# Allegro board AWheel.brd
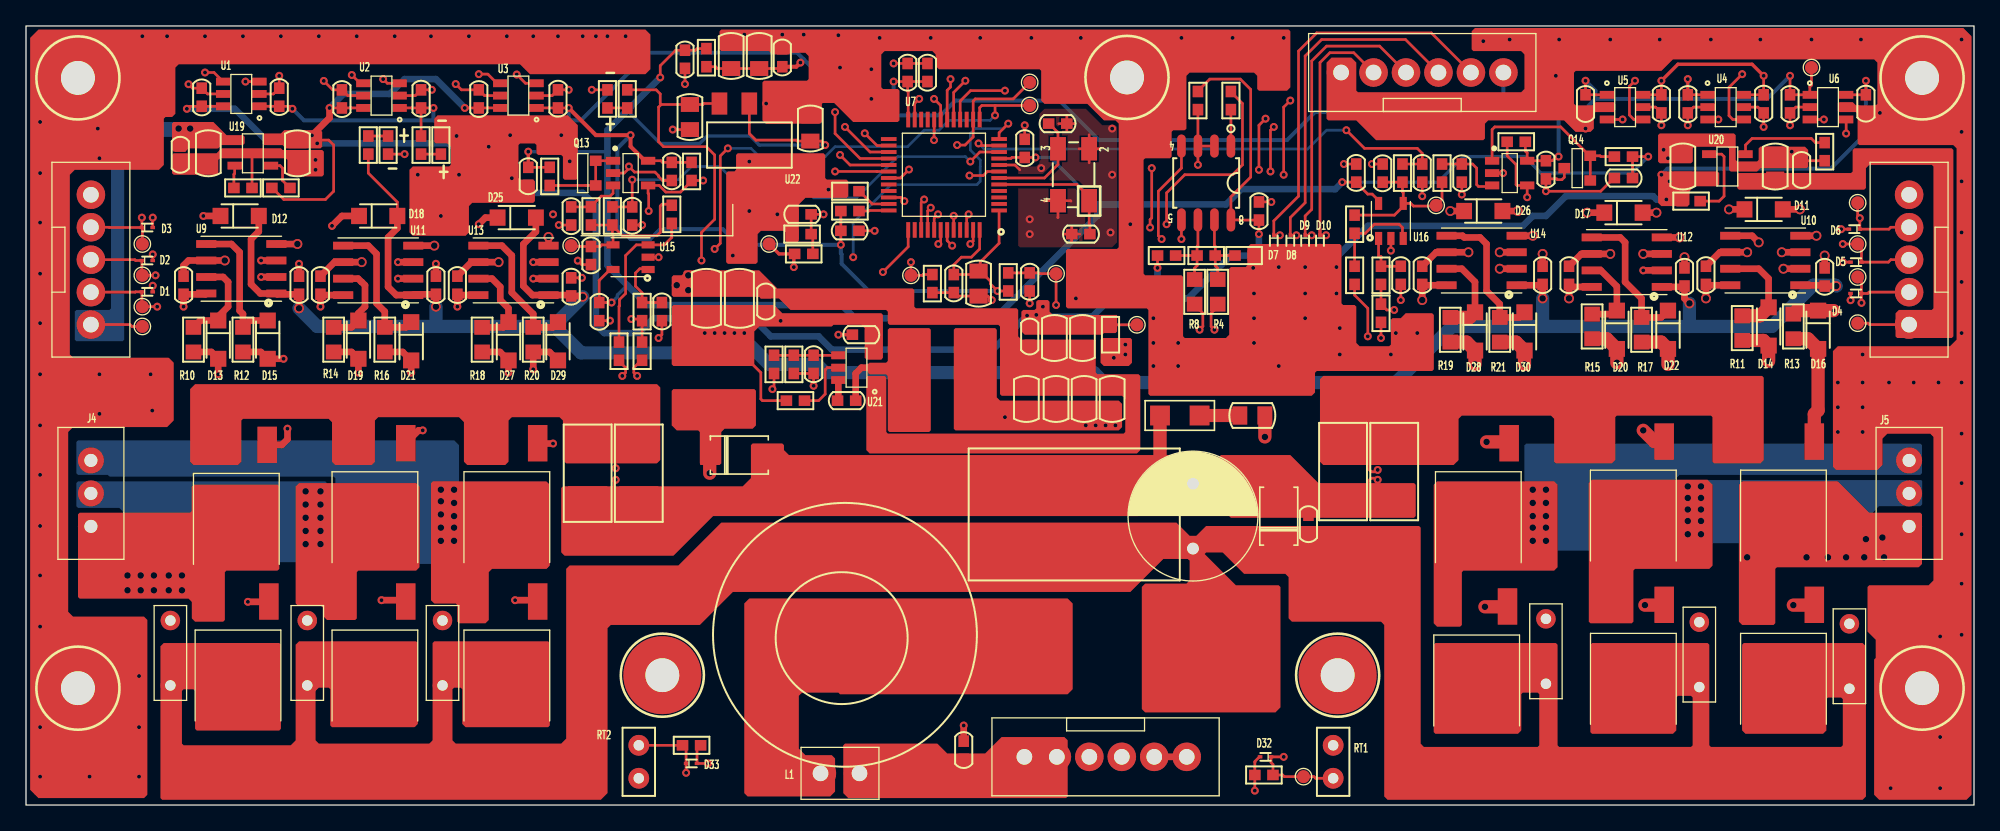
[diagram p0: board, top side]
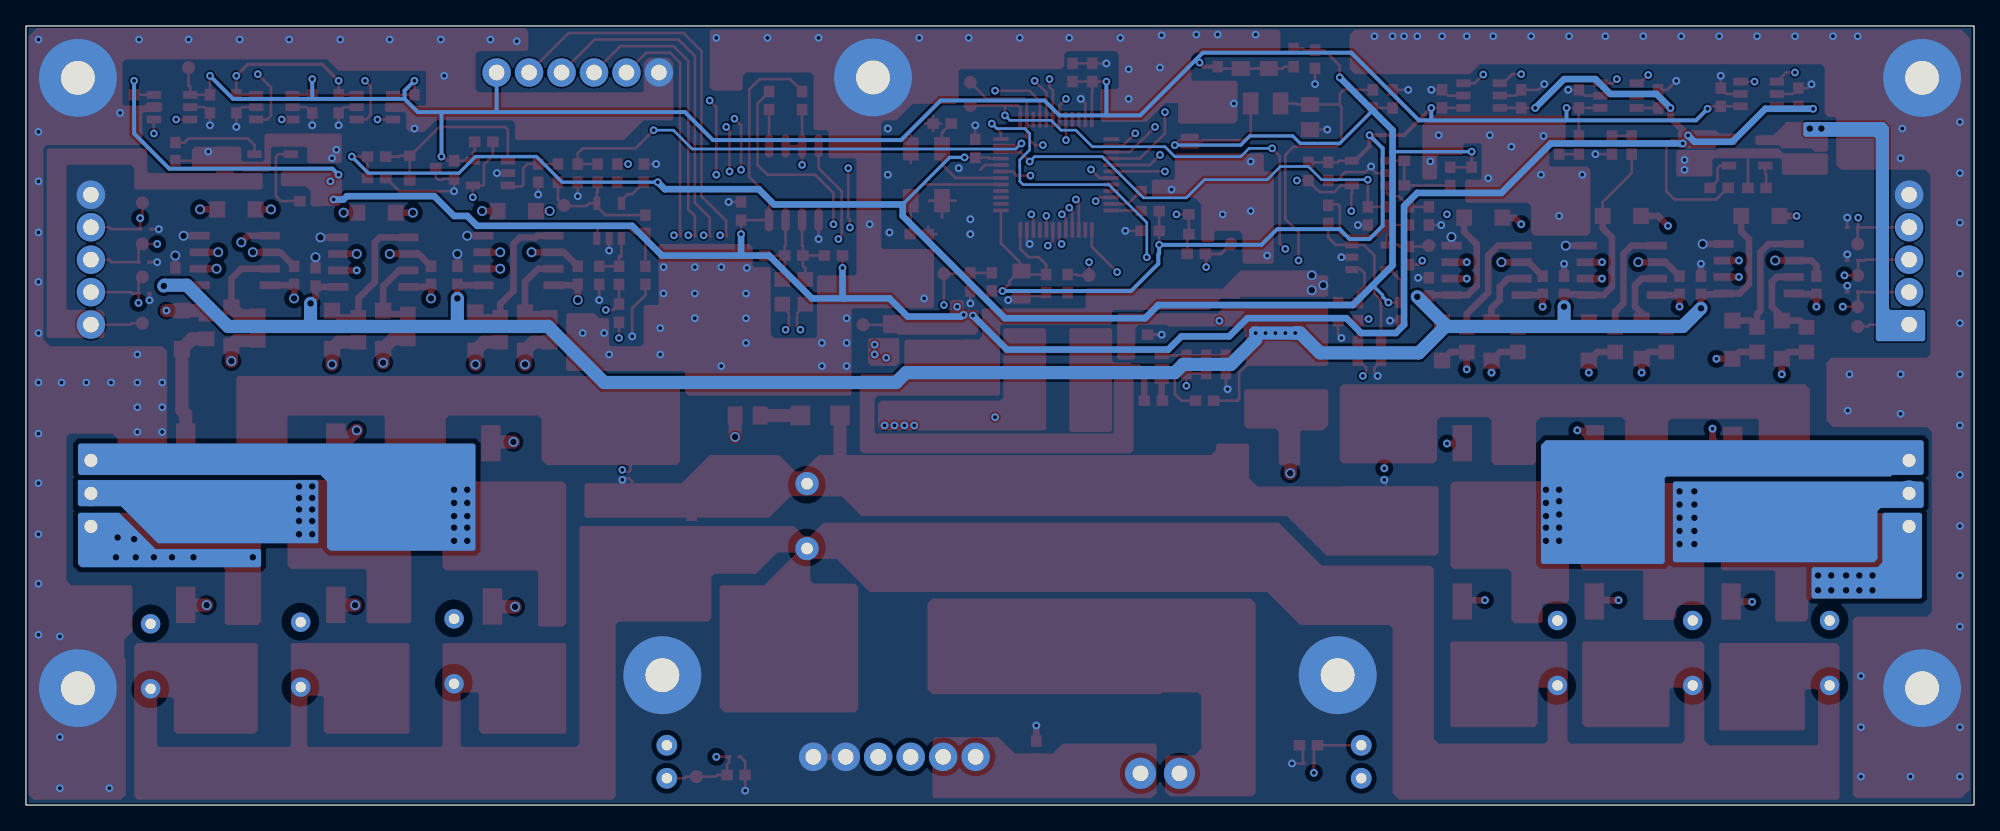
[diagram p1: board, bottom side, seen from below]

Outline 150 x 60 mm; copper layers: TOP, IN1, IN2, BOTTOM. Coordinates in mm from the lower left corner of the outline.
Outline path: rectangle 0,0 150,60

## Placement (name value [footprint] x y rotation side)
C1  0.1uF  [C0603]  19.5 54.51 90 top
C2  0.1uF  [C0603]  13.53 54.51 270 top
C3  0.1uF  [C0603]  24.33 54.38 270 top
C4  0.1uF  [C0603]  30.42 54.38 90 top
C5  0.1uF  [C0603]  40.96 54.38 90 top
C6  0.1uF  [C0603]  34.87 54.38 270 top
C7  0.1uF  [C0603]  120.09 54 270 top
C8  0.1uF  [C0603]  125.93 54 90 top
C9  0.1uF  [C0603]  133.8 54 90 top
C10  0.1uF  [C0603]  127.96 54 270 top
C11  0.1uF  [C0603]  141.68 54 90 top
C12  0.1uF  [C0603]  135.83 54 270 top
C13  12pF  [C0603]  81.22 43.97 0 top
C14  12pF  [C0603]  79.45 52.48 180 top
C15  0.1uF  [C0603]  77.29 40.29 90 top
C16  10uF  [C0805]  73.35 40.16 270 top
C17  0.1uF  [C0603]  63.44 44.22 180 top
C18  0.1uF  [C0603]  71.44 40.16 90 top
C19  0.1uF  [C0603]  69.41 56.42 270 top
C20  0.1uF  [C0603]  67.89 56.42 270 top
C21  0.1uF  [C0603]  94.94 45.75 270 top
C22  1nF  [B32529]  11.12 11.71 90 top
C23  1nF  [B32529]  140.41 11.46 90 top
C24  1uF  [C0603]  12.14 40.03 90 top
C25  1uF  [C0603]  129.36 40.79 90 top
C26  0.1uF  [C0603]  21.03 40.03 90 top
C27  0.1uF  [C0603]  138.5 40.67 90 top
C28  1nF  [B32529]  21.66 11.71 90 top
C29  1nF  [B32529]  128.85 11.58 90 top
C30  1uF  [C0603]  22.68 40.03 90 top
C31  1uF  [C0603]  118.82 40.79 90 top
C32  0.1uF  [C0603]  31.57 40.03 90 top
C33  0.1uF  [C0603]  127.71 40.67 90 top
C34  0.1uF  [C0603]  72.21 4.22 90 top
C35  470uF  [C10X16]  89.86 22.25 90 top
C36  0.1uF  [C0603]  98.75 21.62 90 top
C37  1nF  [B32529]  32.07 11.71 90 top
C38  1nF  [B32529]  117.04 11.84 90 top
C39  1uF  [C0603]  33.22 40.03 90 top
C40  1uF  [C0603]  107.51 40.79 90 top
C41  0.1uF  [C0603]  41.98 39.91 90 top
C42  0.1uF  [C0603]  116.78 40.79 90 top
C43  470pF  [C0805]  94.43 30 180 top
C44  1nF  [C0603]  43.5 42.32 90 top
C45  1nF  [C0603]  104.46 48.67 270 top
C46  0.1uF  [C0603]  44.14 38 270 top
C47  1nF  [C0603]  48.97 38 90 top
C48  0.1uF  [C0603]  102.43 48.67 90 top
C49  1nF  [C0603]  105.86 40.79 90 top
C50  0.1uF  [C0603]  49.73 48.8 90 top
C51  0.1uF  [C0603]  117.04 48.92 90 top
C52  0.1uF  [C0603]  41.98 45.37 270 top
C53  0.1uF  [C0603]  110.56 48.67 270 top
C54  1nF  [C0603]  46.68 45.37 90 top
C55  1nF  [C0603]  107.51 48.67 90 top
C56  0.1uF  [C0603]  38.68 48.41 90 top
C57  0.1uF  [C0603]  123.01 48.29 0 top
C58  10uF  [C0805]  20.9 50.19 270 top
C59  10uF  [C0805]  127.58 49.18 90 top
C60  10uF  [C1206]  54.93 39.02 90 top
C61  10uF  [C1206]  52.39 39.02 90 top
C62  0.1uF  [C0603]  56.97 38.76 90 top
C63  10uF  [C0805]  14.04 50.19 90 top
C64  0.1uF  [C0603]  11.88 50.07 90 top
C65  10uF  [C0805]  134.69 49.18 270 top
C66  0.1uF  [C0603]  136.72 48.92 270 top
C67  1uF  [C0603]  63.19 31.14 0 top
C68  0.1uF  [C0603]  64.33 36.22 180 top
C69  22pF  [C0603]  60.65 33.94 90 top
C70  10uF  [C0805]  83.64 31.27 90 top
C71  10uF  [C0805]  81.48 31.27 90 top
C72  10uF  [C0805]  77.03 31.27 90 top
C73  10uF  [C0805]  79.32 31.27 90 top
C74  10uF  [C0805]  81.35 35.97 270 top
C75  10uF  [C0805]  79.19 35.97 270 top
C76  0.1uF  [C0603]  77.29 36.1 270 top
C77  10uF  [C0805]  51.12 52.99 270 top
C78  10uF  [C0805]  60.4 52.1 90 top
C79  0.1uF  [C0603]  50.74 57.43 270 top
C80  10uF  [C0805]  54.3 57.69 90 top
C81  10uF  [C0805]  56.46 57.69 90 top
C82  0.1uF  [C0603]  58.24 57.56 90 top
C83  1nF  [C0603]  59.76 45.49 0 top
C84  0.1uF  [C0603]  76.91 50.57 90 top
D1  LESD9D5.0CT5G  [SOD-923]  9.34 39.52 180 top
D2  LESD9D5.0CT5G  [SOD-923]  9.34 41.94 180 top
D3  LESD9D5.0CT5G  [SOD-923]  9.34 44.48 180 top
D4  LESD9D5.0CT5G  [SOD-923]  140.91 39.4 0 top
D5  LESD9D5.0CT5G  [SOD-923]  140.91 41.81 0 top
D6  LESD9D5.0CT5G  [SOD-923]  140.79 44.35 0 top
D7  LESD9D3.3CT5G  [SOD-923]  96.08 43.46 90 top
D8  LESD9D3.3CT5G  [SOD-923]  97.35 43.46 90 top
D9  LESD9D3.3CT5G  [SOD-923]  98.5 43.46 90 top
D10  LESD9D3.3CT5G  [SOD-923]  99.64 43.46 90 top
D11  FR102W  [SOD-123FL]  133.8 45.87 180 top
D12  FR102W  [SOD-123FL]  16.45 45.37 180 top
D13  1N4148WL  [SOD-123FL]  14.8 35.84 90 top
D14  1N4148WL  [SOD-123FL]  134.18 36.86 90 top
D15  1N4148WL  [SOD-123FL]  18.61 35.84 90 top
D16  1N4148WL  [SOD-123FL]  137.99 36.6 90 top
D17  FR102W  [SOD-123FL]  123.01 45.62 180 top
D18  FR102W  [SOD-123FL]  27.12 45.37 180 top
D19  1N4148WL  [SOD-123FL]  25.6 35.84 90 top
D20  1N4148WL  [SOD-123FL]  122.5 36.6 90 top
D21  1N4148WL  [SOD-123FL]  29.66 35.71 90 top
D22  1N4148WL  [SOD-123FL]  126.44 36.6 90 top
D23  2CZ20100A0  [TO-263]  79.19 12.09 270 top
D24  SMAJ18A  [SMA]  96.46 24.54 0 top
D25  FR102W  [SOD-123FL]  37.79 45.24 180 top
D26  FR102W  [SOD-123FL]  112.21 45.75 180 top
D27  1N4148WL  [SOD-123FL]  37.15 35.71 90 top
D28  1N4148WL  [SOD-123FL]  111.58 36.48 90 top
D29  1N4148WL  [SOD-123FL]  40.96 35.71 90 top
D30  1N4148WL  [SOD-123FL]  115.39 36.48 90 top
D31  SMAJ18A  [SMA]  57.22 26.95 270 top
D32  LESD9D3.3CT5G  [SOD-923]  95.45 3.71 0 top
D33  LESD9D3.3CT5G  [SOD-923]  51.25 3.2 180 top
D35  LED  [R0603]  27.88 50.83 270 top
D36  LED  [R0603]  31.95 50.83 90 top
D37  LED  [R0603]  44.77 54.38 90 top
H1  Mechanical Hole  [H_M2_6]  146 56 0 top
H2  Mechanical Hole  [H_M2_6]  146 9 0 top
H3  Mechanical Hole  [H_M2_6]  101 10 0 top
H4  Mechanical Hole  [H_M2_6]  49 10 0 top
H5  Mechanical Hole  [H_M2_6]  4 9 0 top
H6  Mechanical Hole  [H_M2_6]  4 56 0 top
H7  Mechanical Hole  [H_M2_6]  84.78 56.03 0 top
J1  ENCA  [B5B-XH-A]  5 42 90 top
J2  CON6  [B6B-XH-A]  83.13 3.71 0 top
J3  ENCB  [B5B-XH-A]  145 42 270 top
J4  MOTORA  [CON3_254]  5 24 90 top
J5  MOTORB  [CON3_254]  145 24 270 top
J6  CON6  [B6B-XH-A]  107.51 56.42 180 top
L1  4mH  [CON2_300]  62.68 2.44 180 top
L2  60uH  [SRN6045]  52.9 32.67 90 top
L3  10uH  [SM7850]  70.56 32.67 0 top
L4  120R  [R0603]  83.51 36.22 90 top
L5  120R  [R0603]  52.39 57.56 270 top
NOREF  -  []  150 0 90 top
NOREF#2  -  []  13.95 15.67 0 top
NOREF#3  -  []  135.33 21.59 90 top
NOREF#4  -  []  123.77 9.02 90 top
NOREF#5  -  []  34.65 15.67 0 top
NOREF#6  -  []  24.49 27.87 0 top
NOREF#7  -  []  24.49 15.67 0 top
NOREF#8  -  []  132.95 15.42 0 top
NOREF#9  -  []  16.33 9.27 90 top
NOREF#10  -  []  86.88 3.71 0 top
NOREF#11  -  []  112.89 48.67 90 top
NOREF#12  -  []  55.7 47.63 90 top
NOREF#13  -  []  52.9 30.52 90 top
NOREF#14  -  []  37.03 9.27 90 top
NOREF#15  -  []  13.82 27.74 0 top
NOREF#16  -  []  0 0 0 top
NOREF#17  -  []  37.03 21.47 90 top
NOREF#18  -  []  34.65 27.87 0 top
NOREF#19  -  []  121.39 27.99 0 top
NOREF#20  -  []  45.2 48.67 90 top
NOREF#21  -  []  111.83 21.47 90 top
NOREF#22  -  []  109.33 15.29 0 top
NOREF#23  -  []  121.39 15.42 0 top
NOREF#24  -  []  43.87 47.72 90 top
NOREF#25  -  []  111.7 8.89 90 top
NOREF#26  -  []  16.2 21.34 90 top
NOREF#27  -  []  135.33 9.02 90 top
NOREF#28  -  []  26.87 9.27 90 top
NOREF#29  -  []  43.87 47.72 90 top
NOREF#30  -  []  120.45 48.1 90 top
NOREF#31  -  []  109.45 27.87 0 top
NOREF#32  -  []  53.4 54.03 0 top
NOREF#33  -  []  112.89 47.72 0 top
NOREF#34  -  []  26.87 21.47 90 top
NOREF#35  -  []  101.26 56.42 0 top
NOREF#36  -  []  45.2 47.72 0 top
NOREF#37  -  []  120.45 48.1 90 top
NOREF#38  -  []  123.77 21.59 90 top
NOREF#39  -  []  132.95 27.99 0 top
Q1  NCE6020AK  [TO252]  16.33 12.47 180 top
Q2  NCE6020AK  [TO252]  135.33 12.22 180 top
Q3  NCE6020AK  [TO252]  16.2 24.54 180 top
Q4  NCE6020AK  [TO252]  135.33 24.79 180 top
Q5  NCE6020AK  [TO252]  123.77 12.22 180 top
Q6  NCE6020AK  [TO252]  26.87 12.47 180 top
Q7  NCE6020AK  [TO252]  26.87 24.67 180 top
Q8  NCE6020AK  [TO252]  123.77 24.79 180 top
Q9  NCE6020AK  [TO252]  37.03 12.47 180 top
Q10  NCE6020AK  [TO252]  111.7 12.09 180 top
Q11  NCE6020AK  [TO252]  37.03 24.67 180 top
Q12  NCE6020AK  [TO252]  111.83 24.67 180 top
Q13  ME431AXG  [SOT-23-3]  42.87 48.67 90 top
Q14  ME431AXG  [SOT-23-3]  119.45 49.05 90 top
R1  4.7K  [R0603]  75.64 40.29 270 top
R2  4.7K  [R0603]  69.79 40.16 90 top
R3  2.2K  [R0603]  93.8 42.32 180 top
R4  22R  [R0805]  91.76 39.52 270 top
R5  100R  [R0603]  92.78 54.26 270 top
R6  120R  [R0603]  90.88 42.32 0 top
R7  4.7K  [R0603]  90.24 54.26 270 top
R8  22R  [R0805]  89.99 39.52 270 top
R9  2.2K  [R0603]  87.83 42.32 180 top
R10  10R  [R0805]  12.9 35.84 270 top
R11  10R  [R0805]  132.15 36.73 270 top
R12  10R  [R0805]  16.71 35.84 270 top
R13  10R  [R0805]  136.09 36.86 270 top
R14  10R  [R0805]  23.69 35.84 270 top
R15  10R  [R0805]  120.59 36.86 270 top
R16  10R  [R0805]  27.63 35.84 270 top
R17  10R  [R0805]  124.4 36.6 270 top
R18  10R  [R0805]  35.12 35.84 270 top
R19  10R  [R0805]  109.67 36.6 270 top
R20  10R  [R0805]  39.06 35.84 270 top
R21  10R  [R0805]  113.48 36.6 270 top
R22  4.7R  [R1206]  88.84 30 180 top
R23  4.99K  [R0603]  47.44 38 270 top
R24  100K  [R0603]  47.44 34.95 270 top
R25  4.99K  [R0603]  104.34 40.79 270 top
R26  100K  [R0603]  104.34 37.87 270 top
R27  33mR  [R2512]  47.19 25.55 90 top
R28  33mR  [R2512]  43.25 25.55 90 top
R29  33mR  [R2512]  105.35 25.68 90 top
R30  33mR  [R2512]  101.42 25.68 90 top
R31  2.49K  [R0603]  45.66 34.95 270 top
R32  2.49K  [R0603]  102.31 40.79 270 top
R33  2K  [R0603]  45.16 45.37 90 top
R34  2K  [R0603]  43.5 45.37 90 top
R35  34.8K  [R0603]  49.73 45.49 270 top
R36  2K  [R0603]  105.99 48.67 90 top
R37  2K  [R0603]  109.04 48.67 90 top
R38  34.8K  [R0603]  102.31 44.73 270 top
R39  4.7K  [R0603]  51.25 48.8 90 top
R40  4.7K  [R0603]  114.75 51.08 0 top
R41  2K  [R0603]  40.33 48.41 90 top
R42  2K  [R0603]  123.01 49.94 0 top
R43  4.7K  [R0603]  19.63 47.53 0 top
R44  4.7K  [R0603]  128.21 46.51 0 top
R45  16.9K  [R0603]  16.71 47.53 0 top
R46  16.9K  [R0603]  138.5 50.32 270 top
R47  200K  [R0603]  59.25 31.14 180 top
R48  100K  [R0603]  59.13 33.94 270 top
R49  18.7K  [R0603]  57.6 33.94 90 top
R50  100K  [R0603]  59.89 42.45 180 top
R51  16.9K  [R0603]  95.32 2.31 180 top
R52  16.9K  [R0603]  51.25 4.6 0 top
R53  18.7K  [R0603]  59.76 43.97 0 top
R54  4.7K  [R0603]  63.44 45.75 180 top
R55  4.7K  [R0603]  63.44 47.27 180 top
R56  16.9K  [R0603]  26.36 50.83 90 top
R57  2.2K  [R0603]  30.42 50.83 270 top
R58  4.7K  [R0603]  46.3 54.38 270 top
RT1  MF52A1103F3435  [CON2_254]  100.65 3.33 270 top
RT2  MF52A1103F3435  [CON2_254]  47.19 3.33 90 top
TP1  TP  [TP100]  8.96 38.38 0 top
TP2  TP  [TP100]  8.96 40.79 0 top
TP3  TP  [TP100]  8.96 43.21 0 top
TP4  TP  [TP100]  141.04 40.67 0 top
TP5  TP  [TP100]  141.04 43.21 0 top
TP6  TP  [TP100]  141.04 46.38 0 top
TP7  TP  [TP100]  68.14 40.79 180 top
TP8  TP  [TP100]  79.32 40.92 180 top
TP9  TP  [TP100]  41.98 43.08 0 top
TP10  TP  [TP100]  108.58 46.18 0 top
TP11  TP  [TP100]  57.22 43.21 180 top
TP12  TP  [TP100]  8.96 36.86 0 top
TP13  TP  [TP100]  141.04 37.11 0 top
TP14  TP  [TP100]  85.54 36.98 0 top
TP15  TP  [TP100]  137.48 56.8 0 top
TP16  TP  [TP100]  77.29 55.65 180 top
TP17  TP  [TP100]  98.37 2.19 0 top
TP18  TP  [TP100]  77.29 53.88 180 top
U1  74LVC1T45W6-7  [SOT-23-6]  16.58 54.76 90 top
U2  74LVC1T45W6-7  [SOT-23-6]  27.38 54.64 90 top
U3  74LVC1T45W6-7  [SOT-23-6]  37.92 54.64 90 top
U4  74LVC1T45W6-7  [SOT-23-6]  130.88 53.75 270 top
U5  74LVC1T45W6-7  [SOT-23-6]  123.13 53.75 270 top
U6  74LVC1T45W6-7  [SOT-23-6]  138.75 53.75 270 top
U7  STM32F030C8T6  [LQFP48]  70.68 48.54 90 top
U8  BL1585B  [SOP-8]  90.88 47.91 180 top
U9  EG2104  [SOIC-8]  16.58 41.3 90 top
U10  EG2104  [SOIC-8]  133.93 41.94 90 top
U11  EG2104  [SOIC-8]  27.12 41.18 90 top
U12  EG2104  [SOIC-8]  123.26 41.81 90 top
U13  EG2104  [SOIC-8]  37.54 41.18 90 top
U14  EG2104  [SOIC-8]  112.08 41.94 90 top
U15  LMV321TP-TR  [SOT23-5]  46.55 42.19 90 top
U16  LMV321TP-TR  [SOT23-5]  105.1 44.99 0 top
U17  TS391AG-AF5-R  [SOT25]  46.55 48.67 270 top
U18  TS391AG-AF5-R  [SOT25]  114.24 48.67 270 top
U19  MT9700  [SOT-23]  17.47 50.19 270 top
U20  MT9700  [SOT-23]  131.01 49.18 90 top
U21  MT1470  [SOT-23-6]  63.95 33.68 90 top
U22  SC1117-3.3  [SOT223]  55.7 50.83 180 top
X1  8MHz  [SY-AGX-5032]  80.72 48.54 90 top

## Library data of the parts
C1-C34 C36-C57 C60-C62 C67-C84 = CAP NP
C35 = CAP_0
C58 C59 C63-C66 = C
D1-D10 D24 D31-D33 = DIODE  TRIG
D11 D12 D17 D18 D25 D26 = DIODE_1
D13-D16 D19-D22 D27-D30 = DIODE_2
D23 = DIODE_DUAL_0
D35-D37 = LED_0
H1-H7 = MH8_0
J1 J3 = CON5
J2 J6 = CON6
J4 J5 = CON3
L1 = INDUCTOR IRON/SM
L2 L3 = INDUCTOR
L4 L5 = FERRITE_BEAD
Q1-Q12 = MOSFET-N
Q13 Q14 = TLV431
R1-R9 R33 R34 R36 R37 R39-R46 R51 R52 R54-R58 = R
R10-R32 R35 R38 R47-R50 R53 = RESISTOR
RT1 RT2 = NTC
TP1-TP18 = TP
U1-U6 = 74LVC1T45W6-7
U7 = STM32F030C8T6
U8 = BL1585B
U9-U14 = EG2104
U15 U16 = LMV321TP-TR
U17 U18 = TS391AG-AF5-R_1
U19 U20 = MT9700
U21 = MT1470
U22 = AP1117E33G-13
X1 = XTAL4P_13

## Footprints (pads in the part's own frame, mm; a bottom-side part is the same pattern mirrored in y, then rotated)
B5B-XH-A
  round 2.2 hole 1.2: 1(-5,0) 2(-2.5,0) 3(0,0) 4(2.5,0) 5(5,0)
B6B-XH-A
  round 2.2 hole 1.2: 1(-6.25,0) 2(-3.75,0) 3(-1.25,0) 4(1.25,0) 5(3.75,0) 6(6.25,0)
B32529
  round 1.5 hole 0.8: 1(-2.5,0) 2(2.5,0)
C10X16
  round 1.8 hole 0.9: 1(-2.5,0) 2(2.5,0)
C0603
  rect 0.889x0.813 smd: 1(-0.699,0) 2(0.699,0)
C0805
  rect 1.143x1.397 smd: 1(-0.965,0) 2(0.965,0)
C1206
  rect 1.27x1.575 smd: 1(-1.397,0) 2(1.397,0)
CON2_254
  round 1.6 hole 0.8: 1(-1.27,0) 2(1.27,0)
CON2_300
  round 2.4 hole 1.2: 1(-1.5,0) 2(1.5,0)
CON3_254
  round 2 hole 1: 1(-2.54,0) 2(0,0) 3(2.54,0)
H_M2_6
  round 6 hole 2.6: 1(0,0)
LQFP48
  rect 0.3x1.2 smd: 1(-2.75,-4.25) 2(-2.25,-4.25) 3(-1.75,-4.25) 4(-1.25,-4.25) 5(-0.75,-4.25) 6(-0.25,-4.25) 7(0.25,-4.25) 8(0.75,-4.25) 9(1.25,-4.25) 10(1.75,-4.25) 11(2.25,-4.25) 12(2.75,-4.25) 25(2.75,4.25) 26(2.25,4.25) 27(1.75,4.25) 28(1.25,4.25) 29(0.75,4.25) 30(0.25,4.25) 31(-0.25,4.25) 32(-0.75,4.25) 33(-1.25,4.25) 34(-1.75,4.25) 35(-2.25,4.25) 36(-2.75,4.25)
  rect 1.2x0.3 smd: 13(4.25,-2.75) 14(4.25,-2.25) 15(4.25,-1.75) 16(4.25,-1.25) 17(4.25,-0.75) 18(4.25,-0.25) 19(4.25,0.25) 20(4.25,0.75) 21(4.25,1.25) 22(4.25,1.75) 23(4.25,2.25) 24(4.25,2.75) 37(-4.25,2.75) 38(-4.25,2.25) 39(-4.25,1.75) 40(-4.25,1.25) 41(-4.25,0.75) 42(-4.25,0.25) 43(-4.25,-0.25) 44(-4.25,-0.75) 45(-4.25,-1.25) 46(-4.25,-1.75) 47(-4.25,-2.25) 48(-4.25,-2.75)
R0603
  rect 0.889x0.813 smd: 1(-0.699,0) 2(0.699,0)
R0805
  rect 1.14x1.2 smd: 1(-0.95,0) 2(0.95,0)
R1206
  rect 1.524x1.524 smd: 1(1.524,0) 2(-1.524,0)
R2512
  rect 2.515x3.023 smd: 1(-2.25,0) 2(2.25,0)
SM7850
  rect 3x7.5 smd: 1(-2.5,0) 2(2.5,0)
SMA
  rect 1.5x1.5 smd: 1(0,0) 2(0,-4.57)
SOD-123FL
  rect 1.22x1.25 smd: 1(-1.475,0) 2(1.475,0)
SOD-923
  rect 0.35x0.25 smd: 1(-0.42,0) 2(0.42,0)
SOIC-8
  rect 0.6x1.55 smd: 1(-1.905,-2.7) 2(-0.635,-2.7) 3(0.635,-2.7) 4(1.905,-2.7) 5(1.905,2.7) 6(0.635,2.7) 7(-0.635,2.7) 8(-1.905,2.7)
SOP-8
  oval 0.66x1.778 smd: 1(-1.905,-2.845) 2(-0.635,-2.845) 3(0.635,-2.845) 4(1.905,-2.845) 5(1.905,2.845) 6(0.635,2.845) 7(-0.635,2.845) 8(-1.905,2.845)
SOT23-5
  rect 0.55x1 smd: 1(-0.95,-1.35) 2(0,-1.35) 3(0.95,-1.35) 4(0.95,1.35) 5(-0.95,1.35)
SOT25
  rect 0.6x1.1 smd: 1(-0.95,-1.35) 2(0,-1.35) 3(0.95,-1.35) 4(0.95,1.35) 5(-0.95,1.35)
SOT223
  rect 1.2x1.7 smd: 1(-2.3,-3.2) 2(0,-3.2) 3(2.3,-3.2)
  rect 3.3x1.6 smd: 4(0,3.2)
SOT-23
  rect 0.6x1.1 smd: 1(-0.95,-1.4) 2(0,-1.4) 3(0.95,-1.4) 4(0.95,1.4) 5(-0.95,1.4)
SOT-23-3
  rect 0.8x0.9 smd: 1(-0.95,-1) 2(0.95,-1) 3(0,1)
SOT-23-6
  rect 0.6x1.1 smd: 1(-0.95,-1.4) 2(0,-1.4) 3(0.95,-1.4) 4(0.95,1.4) 5(0,1.4) 6(-0.95,1.4)
SRN6045
  rect 2x6 smd: 1(-2.15,0) 2(2.15,0)
SY-AGX-5032
  rect 1.803x1.219 smd: 1(-2,-1.15) 2(2,-1.15) 3(2,1.25) 4(-2,1.25)
TO252
  rect 1.5x2.8 smd: 1(-2.376,-3.2) 2(2.376,-3.2)
  rect 6.3x6.4 smd: 3(0,3.2)
TO-263
  rect 1.3x2 smd: 1(-2.54,0) 2(2.54,0)
  rect 9.2x10.2 smd: 3(0,12)
TP100
  round 1 smd: 1(0,0)

## Nets
3.3VCC: C46.1 C48.1 C56.2 C57.2 C78.1 C79.1 C84.1 L5.1 R41.2 R42.2 RT1.1 RT2.1 U7.9(VDDA) U15.5(VCC) U16.5(VCC) U22.2(VOUT)
3.3VDD: C1.1 C4.1 C5.1 C7.1 C10.1 C12.1 C16.1 C17.2 C18.2 C19.2 C20.2 C50.2 C51.2 C80.1 C81.1 C82.1 J6.1 L5.2 R1.2 R39.2 R40.2 R54.2 R57.1 TP15.1 U1.1(VCCA) U2.1(VCCA) U3.1(VCCA) U4.1(VCCA) U5.1(VCCA) U6.1(VCCA) U7.1(VDD1) U7.24(VDD2) U7.48(VDD3) U17.5(VCC) U18.5(VCC)
5VCC: C69.1 C70.1 C71.1 C72.1 C73.1 C77.1 L3.2 L4.1 R48.2 R58.1 U22.3(VIN)
5VDD: C2.2 C3.2 C6.2 C8.2 C9.2 C11.2 C21.2 C58.1 C59.1 C74.1 C75.1 C76.1 L4.2 R7.1 R9.2 R43.1 R44.1 TP14.1 U1.6(VCCB) U2.6(VCCB) U3.6(VCCB) U4.6(VCCB) U5.6(VCCB) U6.6(VCCB) U8.8(VCC) U19.5(VIN) U20.5(VIN)
GND: C1.2 C2.1 C3.1 C4.2 C5.2 C6.1 C7.2 C8.1 C9.1 C10.2 C11.1 C12.2 C13.1 C14.1 C15.1 C16.2 C17.1 C18.1 C19.1 C20.1 C21.1 C22.2 C23.2 C26.2 C27.2 C28.2 C29.2 C32.2 C33.2 C34.2 C35.2 C36.2 C37.2 C38.2 C41.2 C42.2 C46.2 C47.1 C48.2 C49.1 C50.1 C51.1 C52.2 C53.2 C54.1 C55.1 C56.1 C57.1 C58.2 C59.2 C60.2 C61.2 C62.2 C63.1 C64.1 C65.1 C66.1 C68.2 C70.2 C71.2 C72.2 C73.2 C74.2 C75.2 C76.2 C77.2 C78.2 C79.2 C80.2 C81.2 C82.2 C83.1 C84.2 D1.1 D2.1 D3.1 D4.1 D5.1 D6.1 D7.1 D8.1 D9.1 D10.1 D24.1 D31.1 D32.1 D33.1 D35.2(CATHODE) D36.2(CATHODE) D37.2(CATHODE) H1.1 H2.1 H3.1 H4.1 H5.1 H6.1 H7.1 J1.5 J2.5 J2.6 J3.1 J6.6 Q13.3(ANODE) Q14.3(ANODE) R2.1 R3.1 R22.1 R27.1 R28.1 R29.1 R30.1 R31.2 R32.2 R45.2 R46.2 R49.1 R51.2 R52.2 R53.1 R55.2 U1.2(GND) U1.5(DIR) U2.2(GND) U2.5(DIR) U3.2(GND) U3.5(DIR) U4.2(GND) U4.5(DIR) U5.2(GND) U5.5(DIR) U6.2(GND) U6.5(DIR) U7.8(VSSA) U7.23(VSS1) U7.47(VSS2) U8.5(GND) U9.4(GND) U10.4(GND) U11.4(GND) U12.4(GND) U13.4(GND) U14.4(GND) U15.2(GND) U16.2(GND) U17.2(GND) U18.2(GND) U19.2(GND) U20.2(GND) U21.1(GND) U22.1(GND) U22.4(TAB) X1.2 X1.4
VBUS: C34.1 D31.2 J2.1 J2.2 L1.1 L2.1
VCC: C26.1 C27.1 C32.1 C33.1 C41.1 C42.1 C60.1 C61.1 C62.1 C68.1 D11.1(A) D12.1(A) D17.1(A) D18.1(A) D25.1(A) D26.1(A) L2.2 R47.2 R50.2 R56.1 TP11.1 U9.1(VCC) U10.1(VCC) U11.1(VCC) U12.1(VCC) U13.1(VCC) U14.1(VCC) U21.3(VIN)
ADC_IN0: C54.2 R33.2 U7.10(PA0)
ADC_IN1: C55.2 R36.2 U7.11(PA1)
ADC_IN2: D32.2 R51.1 RT1.2 TP17.1 U7.12(PA2)
ADC_IN3: D33.2 R52.1 RT2.2 TP18.1 U7.13(PA3)
ADC_IN4: C83.2 R50.1 R53.2 TP16.1 U7.14(PA4)
BOOT0: R2.2 TP7.1 U7.44(BOOT0)
HALL1: U1.3(A) U7.28(PB15)
HALL2: U2.3(A) U7.27(PB14)
HALL3: U3.3(A) U7.26(PB13)
HALL4: U4.3(A) U7.39(PB3)
HALL5: U5.3(A) U7.40(PB4)
HALL6: U6.3(A) U7.41(PB5)
HALL_IN1: D1.2 J1.2 TP1.1 U1.4(B)
HALL_IN2: D2.2 J1.3 TP2.1 U2.4(B)
HALL_IN3: D3.2 J1.4 TP3.1 U3.4(B)
HALL_IN4: D4.2 J3.4 TP4.1 U4.4(B)
HALL_IN5: D5.2 J3.3 TP5.1 U5.4(B)
HALL_IN6: D6.2 J3.2 TP6.1 U6.4(B)
IN1: U7.29(PA8) U9.2(IN)
IN2: U7.30(PA9) U11.2(IN)
IN3: U7.31(PA10) U13.2(IN)
IN4: U7.16(PA6) U10.2(IN)
IN5: U7.17(PA7) U12.2(IN)
IN6: U7.18(PB0) U14.2(IN)
NRST: C15.2 R1.1 TP8.1 U7.7(NRST)
OSC_IN: C13.2 U7.5(PF0-OSC_IN) X1.1
OSC_OUT: C14.2 U7.6(PF1-OSC_OUT) X1.3
OUTUA: C24.2 J4.1 Q1.2(SOURCE) Q3.3(DRAIN) U9.6(VS)
OUTUB: C25.2 J5.3 Q2.2(SOURCE) Q4.3(DRAIN) U10.6(VS)
OUTVA: C30.2 J4.2 Q6.2(SOURCE) Q7.3(DRAIN) U11.6(VS)
OUTVB: C31.2 J5.2 Q5.2(SOURCE) Q8.3(DRAIN) U12.6(VS)
OUTWA: C39.2 J4.3 Q9.2(SOURCE) Q11.3(DRAIN) U13.6(VS)
OUTWB: C40.2 J5.1 Q10.2(SOURCE) Q12.3(DRAIN) U14.6(VS)
PA5: U7.15(PA5)
PA11: U7.32(PA11)
PA12: U7.33(PA12)
PA15: U7.38(PA15)
PB8: U7.45(PB8)
PB9: R7.2 U7.46(PB9) U8.2(R\E\) U8.3(DE)
PB10: U7.21(PB10)
PB11: U7.22(PB11)
PB12: U7.25(PB12)
PC13: U7.2(PC13)
PC14: U7.3(PC14-OSC32_IN)
PC15: U7.4(PC14-OSC32_OUT)
PF6: R55.1 U7.35(PF6)
PF7: R54.1 U7.36(PF7)
SWCLK: D10.2 J6.5 U7.37(PA14/SCK)
SWDIO: D9.2 J6.4 U7.34(PA13/SWDIO)
UART1_RX: D7.2 J6.2 R5.1 U7.43(PB7/USART1_RX)
UART1_TX: D8.2 J6.3 U7.42(PB6/USART1_TX) U8.4(DI)
VBLDC: C22.1 C23.1 C28.1 C29.1 C35.1 C36.1 C37.1 C38.1 C43.1 D23.3(K) D24.2 Q1.3(DRAIN) Q2.3(DRAIN) Q5.3(DRAIN) Q6.3(DRAIN) Q9.3(DRAIN) Q10.3(DRAIN)
VECDA: C63.2 C64.2 J1.1 TP12.1 U19.1(VOUT)
VECDB: C65.2 C66.2 J3.5 TP13.1 U20.1(VOUT)
N00514: D13.2(K) R10.1 U9.7(HO)
N00518: D15.2(K) R12.1 U9.5(LO)
N00591: C24.1 D12.2(K) U9.8(VB)
N00647: D13.1(A) Q1.1(GATE) R10.2
N00664: D15.1(A) Q3.1(GATE) R12.2
N00708: Q3.2(SOURCE) Q7.2(SOURCE) Q11.2(SOURCE) R24.2 R27.2 R28.2
N02294: D19.2(K) R14.1 U11.7(HO)
N02298: D21.2(K) R16.1 U11.5(LO)
N02334: C30.1 D18.2(K) U11.8(VB)
N02346: D19.1(A) Q6.1(GATE) R14.2
N02362: D21.1(A) Q7.1(GATE) R16.2
N02436: R39.1 U7.20(PB2) U9.3(S\D\) U11.3(S\D\) U13.3(S\D\) U17.4(OUT)
N02448: R40.1 U7.19(PB1) U10.3(S\D\) U12.3(S\D\) U14.3(S\D\) U18.4(OUT)
N03219: D27.2(K) R18.1 U13.7(HO)
N03223: D29.2(K) R20.1 U13.5(LO)
N03259: C39.1 D25.2(K) U13.8(VB)
N03271: D27.1(A) Q9.1(GATE) R18.2
N03287: D29.1(A) Q11.1(GATE) R20.2
N08581: D14.2(K) R11.1 U10.7(HO)
N08585: D16.2(K) R13.1 U10.5(LO)
N08621: C25.1 D11.2(K) U10.8(VB)
N08633: D14.1(A) Q2.1(GATE) R11.2
N08649: D16.1(A) Q4.1(GATE) R13.2
N08681: Q4.2(SOURCE) Q8.2(SOURCE) Q12.2(SOURCE) R26.2 R29.2 R30.2
N08995: D20.2(K) R15.1 U12.7(HO)
N08999: D22.2(K) R17.1 U12.5(LO)
N09035: C31.1 D17.2(K) U12.8(VB)
N09047: D20.1(A) Q5.1(GATE) R15.2
N09063: D22.1(A) Q8.1(GATE) R17.2
N09409: D28.2(K) R19.1 U14.7(HO)
N09413: D30.2(K) R21.1 U14.5(LO)
N09449: C40.1 D26.2(K) U14.8(VB)
N09461: D28.1(A) Q10.1(GATE) R19.2
N09477: D30.1(A) Q12.1(GATE) R21.2
N13042: C67.1 U21.6(BS)
N13046: C67.2 L3.1 U21.2(SW)
N13094: C69.2 R48.1 R49.2 U21.4(FB)
N13344: R47.1 U21.5(EN)
N62608: R43.2 U19.4(EN)
N62698: R45.1 U19.3(SET)
N63460: J2.3 R4.2
N63464: J2.4 R8.2
N63974: R44.2 U20.4(EN)
N64058: R46.1 U20.3(SET)
N64077: R5.2 U8.1(RO)
N64457: R3.2 R4.1 R6.2 U8.7(B)
N64480: R6.1 R8.1 R9.1 U8.6(A)
N70863: C43.2 R22.2
N74962: C44.1 R23.2 R24.1
N74968: C47.2 R23.1 U15.1(IN+)
N75708: C44.2 R33.1 R34.1 R35.1 TP9.1 U15.4(OUT)
N75929: R31.1 R35.2 U15.3(IN-)
N80070: Q13.1(REF) Q13.2(CATHODE) R41.1 U17.1(IN+)
N80316: C52.1 R34.2 U17.3(IN-)
N83162: Q14.1(REF) Q14.2(CATHODE) R42.1 U18.1(IN+)
N83212: C53.1 R37.2 U18.3(IN-)
N83236: C45.2 R36.1 R37.1 R38.1 TP10.1 U16.4(OUT)
N83438: C45.1 R25.2 R26.1
N83442: C49.2 R25.1 U16.1(IN+)
N83588: R32.1 R38.2 U16.3(IN-)
N88074: D23.1(A1) D23.2(A2) L1.2
N917231: D35.1(ANODE) R56.2
N923151: D36.1(ANODE) R57.2
N925221: D37.1(ANODE) R58.2

## Via types
v1: diameter 0.762, hole 0.508, TOP to BOTTOM, 111 vias
v2: diameter 0.61, hole 0.305, TOP to BOTTOM, 357 vias

## Routing (per net, layer and track width the routed paths; a pad name or vN(x,y) marks a point on that pad's centre or on a via; arc(x,y) is an arc through that point)
3.3VCC: length 260.5
  TOP w0.203: U16.5 104.15,46.56 103.66,47.05 103.31,47.05 102.43,47.93 C48.1 v2(101.35,47.97) ; v2(124.91,49.94) R42.2 C57.2 ; U7.9 75.84,49.79 75.92,49.88 C84.1 v2(77.73,49.88) ; U15.5 44.98,41.24 44.14,40.4 C46.1 v2(45.09,38.7) ; C56.2 R41.2 ; U22.2 55.7,51.72 56.2,51.21 59.32,51.21 59.39,51.13 C78.1 61.23,51.13 v2(61.54,50.83) ; v2(48.84,56.03) 48.84,56.94 50.03,58.13 C79.1 51.56,58.13 51.68,58.26 L5.1
  TOP w0.254: C56.2 v2(38.68,50.32)
  IN2 w0.203: v2(45.09,38.7) 43.38,36.98 43.38,18.06 45.16,16.28 52.14,16.28 53.03,15.39 53.03,6.63 48.46,2.06 RT2.1 ; RT1.1 97.35,7.9 97.35,13.49 100.02,16.16 100.02,42.32 101.35,43.65 v2(101.35,47.97)
  BOTTOM w0.254: 46.3,40.03 45.54,39.28 45.54,39.15 v2(45.09,38.7) ; v2(101.35,47.97) 108.72,47.97 110.69,49.94 115.39,49.94 116.66,48.67 123.64,48.67 v2(124.91,49.94) ; v2(77.73,49.88) 78.87,49.88 82.49,46.26 ; v2(38.68,50.32) 44.77,50.32 ; 46.3,53.49 48.84,50.95 51.89,50.95 52.46,51.53 55.75,51.53 56.46,50.83 v2(61.54,50.83)
  BOTTOM w0.508: v2(101.35,47.97) 100.81,47.43 93.57,47.43 92.4,46.26 82.49,46.26 82.49,45.37 74.62,37.49 63.82,37.49 62.81,38.51 47.82,38.51 44.77,41.56 44.77,51.97 v2(48.84,56.03)
3.3VDD: length 245.4
  TOP w0.203: U5.1 120.8,54.7 120.8,54.7 C7.1 v2(120.09,55.78) ; C4.1 v2(31.38,53.69) ; C4.1 R57.1 ; C4.1 29.71,53.69 29.71,53.69 U2.1 ; C82.1 58.1,56.72 C81.1 C80.1 53.24,56.72 53.11,56.86 L5.2 ; v2(41.79,53.69) C5.1 40.25,53.69 40.25,53.69 U3.1 ; v2(20.52,53.62) 20.33,53.81 C1.1 19.5,53.81 U1.1 ; v2(62.74,43.14) C17.2 R54.2 ; 73.48,41.13 73.48,41.81 74.93,43.27 U7.1 ; 73.48,41.13 74.26,40.34 74.26,40.13 v2(74.81,39.59) R1.2 ; 73.48,41.13 C16.1 73.08,40.86 C18.2 71.44,41.61 72.03,42.19 72.8,42.19 73.43,42.83 U7.48 ; v2(127.96,55.91) C10.1 127.96,54.7 U4.1 ; U7.24 67.93,54.92 67.89,54.97 C20.2 ; R39.2 C50.2 49.02,49.49 48.89,49.62 U17.5 ; TP15.1 137.48,55.43 137.35,55.3 U6.1 135.84,54.7 C12.1 v2(135.83,56.16) ; R40.2 115.45,50.37 115.59,50.23 U18.5 117.03,49.62 C51.2 117.52,49.62 117.84,49.94 v2(118.01,49.94) ; C20.2 C19.2 ; C20.2 v2(66.81,55.72)
  TOP w0.305: v2(59.63,57.18) 59.32,56.86 C82.1 ; v2(41.79,53.69) 43.89,51.59 v2(46.55,51.59) 46.55,50.72 47.65,49.62 U17.5
  BOTTOM w0.305: 41.85,52.73 31.44,52.73 ; 41.85,52.73 42.74,52.73 47.95,57.94 59.38,57.94 59.89,57.43 ; 41.85,52.73 41.79,52.8 v2(41.79,53.69) ; 31.44,52.73 21.41,52.73 v2(20.52,53.62) ; 31.44,52.73 31.38,52.8 v2(31.38,53.69) ; 127.96,54.38 134.06,54.38 v2(135.83,56.16) ; 127.96,54.38 120.85,54.38 ; 127.96,54.38 v2(127.96,55.91) ; 66.75,53.11 66.81,53.18 v2(66.81,55.72) ; 66.75,53.11 70.43,53.11 71.57,54.26 79.57,54.26 82.62,51.21 97.1,51.21 99.26,53.37 113.74,53.37 ; 66.75,53.11 64.21,53.11 59.89,57.43 ; 59.89,57.43 59.63,57.18 v2(59.63,57.18) ; v2(74.81,39.59) 64.9,39.59 62.81,41.68 62.81,42.42 62.74,42.48 v2(62.74,43.14) 54.87,43.14 53.66,44.35 48.84,44.35 48.08,43.59 46.55,43.59 45.54,44.6 45.54,50.57 v2(46.55,51.59) ; 120.85,54.38 119.83,53.37 118.05,53.37 ; 120.85,54.38 120.85,55.02 v2(120.09,55.78) ; 113.74,53.37 118.05,53.37 ; 113.74,53.37 113.76,53.39 J6.1 ; v2(118.01,49.94) 118.01,53.32 118.05,53.37
5VCC: length 55.7
  TOP w0.203: R58.1 48.52,55.08 48.84,54.76 48.84,54.03 48.91,53.95 ; v2(52.01,41.94) 52.01,44.1 53.03,45.11 53.03,50.07 52.39,50.7 49.09,50.7 48.71,51.08 48.71,53.75 48.91,53.95 ; 48.91,53.95 C77.1 52.13,53.95 52.2,54.03 U22.3 ; R48.2 C69.1 v2(60.65,32.29)
  IN2 w0.203: v2(52.01,41.94) 52.01,40.92 v2(60.65,32.29) 72.97,32.29 v2(75.38,29.87)
  vias: v2(81.6,29.24) v2(82.37,29.24) v2(83.13,29.24) v2(83.76,34.44) v2(83.89,29.24) v2(84.65,35.46) v2(84.65,34.7)
5VDD: length 239.8
  TOP w0.203: U3.6 35.58,53.69 35.58,53.69 C6.2 v2(33.79,53.69) ; v2(141.68,55.78) C11.2 141.67,54.7 U6.6 ; U1.6 14.25,53.81 14.24,53.81 C2.2 12.58,53.81 v2(12.39,53.62) ; v2(133.8,56.16) C9.2 133.8,54.7 U4.6 ; R44.1 127.51,47.27 127.58,47.34 C59.1 ; v2(125.93,55.78) C8.2 125.92,54.7 U5.6 ; R43.1 18.97,47.53 19.86,46.64 23.06,46.64 23.69,47.27 23.69,50.83 23.31,51.21 22.42,51.21 ; R7.1 90.24,54.99 91.15,55.91 93.5,55.91 94.3,55.11 94.3,48.36 92.78,46.84 U8.8 93.42,45.06 93.43,45.05 C21.2 v2(94.94,43.97) ; U2.6 25.04,53.69 25.04,53.69 C3.2 v2(23.37,53.69) ; R9.2 v2(87.13,41.37) ; L4.2 83.57,36.98 TP14.1
  TOP w0.254: v2(133.8,56.16) 132.91,57.05 127.2,57.05 v2(125.93,55.78)
  TOP w0.508: v2(22.02,51.57) 23.37,52.93 v2(23.37,53.69)
  IN2 w0.254: v2(133.8,56.16) 134.69,57.05 140.41,57.05 v2(141.68,55.78)
  BOTTOM w0.305: v2(125.93,48.54) 126.39,49.01 138.97,49.01 141.68,51.72 v2(141.68,55.78)
  BOTTOM w0.508: v2(12.39,53.62) 16.07,53.62 18.61,51.08 21.53,51.08 v2(22.02,51.57) ; v2(77.08,37.7) 74.47,35.08 62.05,35.08 61.03,36.1 57.35,36.1 55.95,37.49 48.33,37.49 47.19,36.35 44.52,36.35 43.89,36.98 43.89,46.13 42.87,47.14 36.39,47.14 32.58,50.95 v2(22.42,50.95) ; v2(33.79,53.69) 31.57,55.91 29.15,55.91 28.01,54.76 24.45,54.76 v2(23.37,53.69) ; v2(87.13,41.37) 87.13,39.08 87.07,39.02 ; v2(77.79,37.75) 77.86,37.75 77.99,37.62 82.11,37.62 83.51,39.02 87.07,39.02 ; 87.07,39.02 89.48,39.02 92.78,42.32 94.81,42.32 ; v2(126.31,46.64) 125.55,46.64 125.29,46.89 118.56,46.89 117.04,45.37 116.02,45.37 115.26,44.6 103.32,44.6 101.04,42.32 94.81,42.32 ; 94.81,42.32 94.94,42.45 v2(94.94,43.97)
  vias: v2(78.3,38.38) v2(126.56,48.03)
GND: length 235.1
  TOP w0.203: D36.2 v2(33.15,51.53) ; v2(72.71,43.21) 72.93,43.43 U7.47 ; R52.2 51.67,4.32 D33.1 v2(52.52,3.2) ; U16.2 v2(105.1,42.7) ; 118.4,49.05 Q14.3 118.45,48.35 118.27,48.16 117.93,48.16 117.86,48.22 C51.1 v2(117.04,47.27) 121.25,47.27 122.27,48.29 C57.1 ; U4.2 128.4,53.75 C10.2 v2(127.96,52.35) ; X1.4 79.47,45.26 79.45,45.24 ; X1.4 78.46,46.54 78.43,46.51 ; X1.4 80.43,46.54 80.46,46.51 ; v2(57.47,32.03) 57.6,32.16 R49.1 ; v2(103.32,36.1) 103.32,38.25 102.31,39.27 R32.2 ; v2(45.92,33.05) 46.17,33.3 46.17,33.68 45.66,34.19 R31.2 ; U6.5 141.23,53.75 C11.1 v2(142.75,53.3) ; v2(33.09,55.53) 33.53,55.08 C6.1 35.31,54.64 U3.5 ; R55.2 61.92,47.27 v2(61.79,47.4) ; U2.2 29.98,54.64 C4.2 v2(31.25,55.08) ; v2(48.71,35.97) 48.97,36.22 C47.1 ; C13.1 81.15,43.97 ; C13.1 80.52,43.39 ; C13.1 80.52,44.55 ; C13.1 79.9,43.97 ; D35.2 v2(29.15,50.13) ; D1.1 v2(9.76,39.99) ; v2(120.09,52.1) C7.2 120.53,53.75 U5.2 ; v2(74.37,38.89) 74.06,39.19 C16.2 71.71,39.19 C18.1 R2.1 ; C17.1 v2(65.35,44.22) ; C56.1 37.97,47.72 v2(37.41,48.28) ; U7.8 76.15,49.29 76.52,48.92 ; v2(94.62,1.11) R51.2 94.62,3.31 94.64,3.32 94.64,3.37 94.98,3.71 D32.1 ; C52.2 v2(41.03,44.67) ; U8.5 v2(88.97,43.59) ; C41.2 v2(42.81,40.6) ; D4.1 v2(140.49,38.88) ; 79.52,52.48 C14.1 ; C14.1 80.14,51.89 ; C14.1 80.14,53.06 ; C14.1 80.77,52.48 ; U2.5 24.77,54.64 C3.1 23.62,55.08 v2(22.93,55.77) ; v2(135.83,52.35) C12.2 136.28,53.75 U6.2 ; D5.1 v2(139.9,41.81) ; 81.08,50.54 X1.2 ; X1.2 81.87,51.62 ; X1.2 82.65,50.54 ; X1.2 81.87,49.46 ; C48.2 v2(101.48,49.37) ; U18.2 v2(113.74,48.67) ; C21.1 v2(95.89,46.45) ; C15.1 v2(77.29,38.64) ; v2(133.8,52.22) C9.1 133.36,53.75 U4.5 ; 103.32,24.41 103.32,24.92 103.58,25.17 103.96,25.17 v2(104.08,25.05) ; C46.2 v2(44.96,37.3) ; R3.1 v2(94.49,41.37) ; D6.1 v2(139.77,44.35) ; v2(125.93,52.35) C8.1 125.48,53.75 U5.5 ; C53.2 v2(110.56,47.02) ; C84.2 v2(76.91,52.35) ; C49.1 v2(105.86,38.89) ; v2(47.44,44.67) C54.1 ; U17.2 46.06,48.67 46.43,49.04 v2(46.43,49.18) 46.86,48.75 48.43,48.75 48.71,48.47 48.71,48.4 49.02,48.1 C50.1 ; v2(68.78,54.38) 68.43,54.04 U7.23 ; U15.2 v2(48.71,42.19) ; v2(45.41,25.05) 45.28,24.92 45.28,24.28 ; R45.2 17.41,50 17.47,50.07 ; v2(41.79,55.08) C5.2 40.52,54.64 U3.2 ; C77.2 v2(49.8,52.02) ; D2.1 v2(9.76,42.41) ; U22.4 v2(55.7,49.56) ; C55.1 v2(107.51,46.89) ; U1.2 19.06,54.76 C1.2 v2(19.5,56.16) ; C19.1 C20.1 v2(66.81,57.11) ; U1.5 13.98,54.76 C2.1 12.82,55.21 v2(12.52,55.51) ; R46.2 C66.1 ; D37.2 v2(43.57,55.08) ; D3.1 v2(9.76,45.24) ; Q13.3 v2(41.87,49.57) ; C79.2 v2(50.74,55.53)
  TOP w0.254: v2(57.86,45.49) C83.1 R53.1 ; C68.2 v2(62.55,36.22) ; U22.4 v2(55.7,45.75)
  TOP w0.508: U13.4 v1(40.23,43.75) ; C26.2 v2(21.03,41.68) ; C27.2 v1(138.5,42.32) ; C33.2 v1(127.71,42.19) ; U9.4 v1(20.9,43.21) ; J2.6 J2.5 ; C42.2 v1(116.78,42.45) ; U11.4 v1(31.44,43.08) ; C34.2 v2(72.21,6.12) ; U14.4 v1(116.02,43.84) ; U12.4 v1(127.32,43.72) ; U10.4 v1(137.87,43.84) ; C32.2 v2(31.57,41.68)
  TOP w1.016: 87.32,30 87.32,26.44
  IN2 w0.203: v2(103.32,36.1) 103.32,35.08 102.31,34.06 102.31,25.68 102.81,25.17 103.32,25.17 103.45,25.05 v2(104.08,25.05) ; v2(45.41,25.05) 46.02,25.05 46.15,25.17 47.66,25.17 48.58,26.1 48.58,34.19 48.2,34.57 46.68,34.57 46.17,34.06 46.17,33.3 v2(45.92,33.05)
  IN2 w1.016: v1(51,39.65) 51,32.16 73.6,9.55 82.87,9.55 86.88,5.55 J2.5
  vias: v1(50.11,40.03) v1(51,40.79) v2(1.09,52.61) v2(1.09,48.67) v2(1.09,44.86) v2(1.09,40.92) v2(1.09,37.11) v2(1.09,33.17) v2(1.09,29.24) v2(1.09,25.43) v2(1.09,21.49) v2(1.09,17.68) v2(1.09,13.74) v2(1.09,6) v2(1.09,2.19) v2(4.9,2.19) v2(5.53,52.1) v2(5.66,49.81) v2(5.66,33.17) v2(5.66,30.13) v2(8.71,9.93) v2(8.71,6) v2(8.71,2.19) v2(8.96,59.21) v2(9.6,33.17) v2(9.72,30.38) v2(10.87,59.21) v2(13.79,59.21) v2(16.71,59.21) v2(19.63,59.21) v2(22.3,49.68) v2(22.3,48.92) v2(22.55,59.21) v2(25.47,59.21) v2(28.39,59.21) v2(30.17,48.54) v2(31.19,59.21) v2(31.95,45.37) v2(33.34,48.54) v2(34.11,59.21) v2(35.63,50.7) v2(37.03,59.21) v2(37.28,51.59) v2(39.06,59.21) v2(40.96,59.21) v2(41.22,51.59) v2(42.87,59.21) v2(43.89,59.21) v2(44.77,59.21) v2(46.17,59.21) v2(54.43,42.32) v2(55.32,59.34) v2(56.99,54.03) v2(58.24,59.34) v2(59.89,59.34) v2(62.55,59.29) v2(62.68,56.8) v2(65.09,56.67) v2(65.09,54.38) v2(65.73,59.08) v2(69.67,59.08) v2(73.48,59.08) v2(77.29,45.11) v2(77.29,43.97) v2(77.41,59.08) v2(78.18,49.05) v2(80.84,39.02) v2(81.22,59.08) v2(83.51,44.1) v2(83.64,52.1) v2(83.64,48.54) v2(85.03,44.73) v2(86.81,37.49) v2(86.81,35.59) v2(86.81,33.81) v2(88.72,35.59) v2(88.72,33.81) v2(88.97,59.08) v2(92.91,59.08) v2(94.56,39.4) v2(94.56,37.49) v2(94.56,35.59) v2(96.46,41.43) v2(96.46,33.81) v2(96.84,59.08) v2(98.5,41.43) v2(98.5,39.4) v2(98.5,37.49) v2(100.91,41.43) v2(100.91,39.4) v2(101.16,36.73) v2(101.16,34.7) v2(105.1,34.7) v2(105.48,36.35) v2(107.13,36.35) v2(112.21,58.83) v2(114.24,58.96) v2(117.8,56.16) v2(118.05,58.96) v2(121.99,58.96) v2(125.8,58.96) v2(126.1,50.47) v2(126.44,49.81) v2(129.74,58.96) v2(133.55,58.96) v2(135.96,50.32) v2(137.48,58.96) v2(139.52,32.54) v2(139.52,30.63) v2(139.52,28.73) v2(141.29,58.96) v2(141.42,34.7) v2(141.42,32.54) v2(141.42,30.63) v2(141.42,28.73) v2(143.45,32.54) v2(143.58,1.3) v2(145.36,32.54) v2(147.26,32.54) v2(147.39,12.98) v2(147.39,5.23) v2(147.39,1.3) v2(149.04,58.96) v2(149.04,51.84) v2(149.04,48.03) v2(149.04,44.1) v2(149.04,40.29) v2(149.04,36.35) v2(149.04,32.54) v2(149.04,28.6) v2(149.04,24.79) v2(149.04,20.86) v2(149.04,17.05) v2(149.04,13.11)
VBUS: length 29.3
  TOP w1.016: D31.2 52.65,26.95 v1(52.65,25.55)
  IN2 w1.016: v1(52.65,25.55) 52.65,25.17 64.18,13.64 L1.1
VCC: length 217.6
  TOP w0.203: R47.2 56.71,31.14 56.59,31.27 56.59,33.3 55.95,33.94 ; D18.1 28.6,46.43 26.36,48.67 R56.1
  TOP w0.254: v2(59.13,41.43) 59.13,42.38 R50.2 57.98,42.45 TP11.1
  TOP w0.508: D18.1 28.6,44.43 27.88,43.72 27.88,39.91 28.52,39.27 U11.1 29.88,39.33 C32.1 v1(31.57,38.38) ; D17.1 v1(125.55,45.62) ; 136.63,40.03 138.44,40.03 C27.1 v1(139.39,39.97) ; v1(42.87,39.14) 42.81,39.21 C41.1 41.92,39.27 U13.1 39,39.27 38.3,39.98 38.3,43.19 39.26,44.16 D25.1 ; v1(116.78,39.02) C42.1 116.72,40.03 114.78,40.03 ; U12.1 127.64,39.91 C33.1 127.71,39.02 v1(128.09,38.64) ; v1(21.03,38.25) C26.1 19.34,39.33 U9.1 18.05,39.4 17.33,40.11 17.33,43.58 17.93,44.17 D12.1 ; D11.1 v1(136.6,45.87) ; D26.1 v1(114.88,45.75)
  IN2 w0.254: v2(58.11,37.29) 58.11,40.41 v2(59.13,41.43)
  IN2 w0.508: v1(116.78,39.02) 116.78,40.41 114.88,42.32 v1(114.88,45.75) ; v1(139.39,39.97) 137.93,39.97 136.6,41.3 v1(136.6,45.87) ; v1(125.55,45.62) 125.55,43.33 126.69,42.19 126.69,40.03 v1(128.09,38.64)
  BOTTOM w1.016: 40.71,36.86 40.71,36.98 v1(42.87,39.14) ; 40.71,36.86 31.57,36.86 ; 40.71,36.86 42.74,34.83 50.36,34.83 51.89,36.35 v2(52.27,36.35) ; 31.57,36.86 22.42,36.86 v1(21.03,38.25) ; 31.57,36.86 v1(31.57,38.38) ; 116.78,36.86 109.8,36.86 105.48,32.54 83,32.54 82.24,33.3 61.54,33.3 60.9,33.94 57.22,33.94 55.32,35.84 v2(55.32,36.35) ; 116.78,36.86 v1(116.78,39.02) ; 116.78,36.86 128.09,36.86 ; v1(139.39,39.97) 139.33,40.03 137.61,40.03 134.44,36.86 128.09,36.86 ; 128.09,36.86 v1(128.09,38.64)
  vias: v2(53.03,36.35) v2(53.79,36.35) v2(54.55,36.35)
ADC_IN0: length 35.1
  TOP w0.203: v2(46.68,48.16) C54.2 R33.2 ; U7.10 73.45,50.29 v2(72.71,49.56)
  BOTTOM w0.203: v2(72.71,49.56) 72.33,49.94 67.13,49.94 63.95,46.76 60.65,46.76 59.25,48.16 54.43,48.16 53.41,49.18 51.25,49.18 50.24,48.16 v2(46.68,48.16)
ADC_IN1: length 39.7
  TOP w0.203: R36.2 C55.2 107.51,50.19 107.13,50.57 103.07,50.57 v2(101.67,51.97) ; U7.11 73.51,50.79 v2(73.35,50.95)
  BOTTOM w0.203: v2(73.35,50.95) 73.78,50.52 98.7,50.52 100.15,51.97 v2(101.67,51.97)
ADC_IN2: length 104.5
  TOP w0.203: RT1.2 99.3,2.06 99.17,2.19 TP17.1 96.89,2.19 96.77,2.31 R51.1 96.02,3.13 95.87,3.28 D32.2 v2(96.84,3.71) ; U7.12 74.93,51.78 v2(75.64,52.48)
  IN2 w0.203: v2(96.84,3.71) 96.84,13.74 99.13,16.03 99.13,35.08 95.51,38.7 84.08,38.7 82.24,36.86 64.5,36.86 63.7,37.66 v2(63.7,42.19)
  BOTTOM w0.203: v2(63.7,42.19) 63.7,44.86 66.62,47.78 73.22,47.78 73.48,48.03 73.48,49.17 73.48,49.18 73.48,49.68 72.71,50.45 72.71,51.72 73.1,52.1 75.25,52.1 v2(75.64,52.48)
ADC_IN3: length 97.7
  TOP w0.203: 74.62,53.88 73.6,53.88 73.43,53.7 U7.13 ; 74.62,53.88 v2(74.62,53.11) ; 74.62,53.88 TP18.1 ; v2(54.05,50.57) 53.46,49.99 53.46,43.26 v2(53.03,42.83) ; v2(50.83,2.48) D33.2 50.83,4.32 R52.1 RT2.2
  IN2 w0.203: v2(53.03,42.83) 48.03,42.83 47.82,42.62 47.82,37.37 43.89,33.43 43.89,18.7 45.54,17.05 52.01,17.05 53.74,15.32 53.74,5.39 v2(50.83,2.48)
  BOTTOM w0.203: v2(54.05,50.57) 55.82,50.57 56.46,49.94 61.54,49.94 62.3,50.7 67.89,50.7 69.16,51.97 70.3,51.97 71.06,52.73 74.24,52.73 v2(74.62,53.11)
ADC_IN4: length 25.8
  TOP w0.203: R50.1 60.59,43.84 R53.2 C83.2 v2(61.41,45.49) ; TP16.1 76.02,54.38 73.1,54.38 72.93,54.22 U7.14 72.93,51.45 72.31,50.83 v2(71.7,50.83)
  IN2 w0.203: v2(71.7,50.83) 71.06,50.19 66.11,50.19 v2(61.41,45.49)
BOOT0: length 9.1
  TOP w0.203: R2.2 69.08,40.86 69.02,40.79 TP7.1 v2(68.14,41.81) ; U7.44 v2(71.43,45.38)
  IN2 w0.203: v2(71.43,45.38) 70.4,44.35 69.7,44.35 68.14,42.79 v2(68.14,41.81)
HALL1: length 56.1
  TOP w0.203: U7.28 64.22,49.79 62.3,51.72 v2(62.3,53.37) ; U1.3 v2(16.9,55.72)
  IN2 w0.203: v2(16.9,55.72) 17.53,55.72 20.01,58.19 57.47,58.19 v2(62.3,53.37)
HALL2: length 44
  TOP w0.203: v2(63.06,52.22) 64.99,50.29 U7.27 ; U2.3 27.82,55.59 v2(27.5,55.91)
  IN2 w0.203: v2(27.5,55.91) 29.15,57.56 56.97,57.56 62.3,52.22 v2(63.06,52.22)
HALL3: length 33.6
  TOP w0.203: U7.26 65.53,50.79 v2(64.59,51.73) ; U3.3 38.46,55.59 v2(37.79,56.26)
  IN2 w0.203: v2(37.79,56.26) 38.45,56.92 56.59,56.92 62.21,51.3 64.15,51.3 v2(64.59,51.73)
HALL4: length 69.6
  TOP w0.203: v2(69.16,46.64) 68.93,46.41 U7.39 ; v2(95.45,52.86) 94.94,52.35 v2(94.94,48.92) ; U4.3 v2(130.31,52.8)
  IN2 w0.203: v2(94.94,48.92) 93.54,47.53 70.05,47.53 v2(69.16,46.64) ; v2(130.31,52.8) 129.61,53.49 97.61,53.49 96.97,52.86 v2(95.45,52.86)
HALL5: length 61
  TOP w0.203: v2(96.08,52.22) 95.83,51.97 v2(95.83,48.8) ; v2(69.67,46) 69.43,45.77 U7.40 ; U5.3 v2(122.94,52.8)
  IN2 w0.203: v2(96.08,52.22) 97.29,52.22 97.86,52.8 v2(122.94,52.8) ; v2(95.83,48.8) 93.92,46.89 70.56,46.89 v2(69.67,46)
HALL6: length 77.9
  TOP w0.203: v2(96.84,48.54) 96.84,53.75 v2(97.35,54.26) ; U7.41 69.93,45.2 v2(70.23,45.49) ; U6.3 v2(138.44,52.8)
  IN2 w0.203: v2(138.44,52.8) 136.98,54.26 v2(97.35,54.26) ; v2(70.23,45.49) 70.86,46.13 94.43,46.13 v2(96.84,48.54)
HALL_IN1: length 30.5
  TOP w0.203: J1.2 8.42,39.5 8.44,39.52 D1.2 8.92,38.42 TP1.1 v2(10.1,38.38) ; v2(13.79,56.42) 14.48,56.42 U1.4
  IN2 w0.203: v2(10.1,38.38) 7.56,40.92 7.56,51.72 12.26,56.42 v2(13.79,56.42)
HALL_IN2: length 37.5
  TOP w0.203: v2(25.09,56.22) 25.72,55.59 U2.4 25.91,55.65 ; v2(9.98,40.79) TP2.1 8.92,40.83 D2.2 8.44,41.94 8.38,42 J1.3
  IN2 w0.203: v2(25.09,56.22) 23.63,54.76 11.75,54.76 8.2,51.21 8.2,42.57 v2(9.98,40.79)
HALL_IN3: length 41.7
  TOP w0.203: TP3.1 8.96,44.44 D3.2 ; D3.2 v2(8.92,45.24) ; D3.2 6.43,44.48 6.4,44.5 J1.4 ; v2(34.87,56.29) 35.57,56.29 36.27,55.59 U3.4
  IN2 w0.203: v2(8.92,45.24) 8.92,50.79 10.99,52.86 31.44,52.86 v2(34.87,56.29)
HALL_IN4: length 37.1
  TOP w0.203: D4.2 141.81,39.4 141.91,39.5 J3.4 ; D4.2 141.33,40.38 TP4.1 ; D4.2 v2(141.33,38.67) ; U4.4 131.43,52.8 131.13,53.09 131.13,55.27 v2(132.15,56.29)
  IN2 w0.203: v2(132.15,56.29) 133.04,55.4 139.26,55.4 142.95,51.72 142.95,40.29 v2(141.33,38.67)
HALL_IN5: length 40.8
  TOP w0.203: v2(139.9,43.21) TP5.1 141.33,42.92 D5.2 143.41,41.81 143.6,42 J3.3 ; U5.4 123.81,52.8 123.46,53.14 123.46,55.35 v2(123.9,55.78)
  IN2 w0.203: v2(139.9,43.21) 141.29,43.21 142.31,44.22 142.31,51.59 139.01,54.89 124.78,54.89 v2(123.9,55.78)
HALL_IN6: length 14
  TOP w0.203: v2(140.15,51.72) 140.15,51.72 U6.4 ; TP6.1 141.04,45.37 v2(141.21,45.2) D6.2 143.45,44.35 143.6,44.5 J3.2
  IN2 w0.203: v2(141.21,45.2) 141.21,50.66 v2(140.15,51.72)
IN1: length 55.9
  TOP w0.203: U7.29 63.45,49.29 v2(62.68,50.07)
  TOP w0.508: U9.2 v2(18.1,40.67)
  IN2 w0.203: v2(18.1,40.67) 19.25,41.81 19.25,45.62 21.03,47.4 60.01,47.4 v2(62.68,50.07)
IN2: length 44.3
  TOP w0.203: U7.30 65.53,48.79 65.52,48.8 v2(62.3,48.8)
  TOP w0.508: U11.2 v2(28.65,40.54)
  IN2 w0.203: v2(62.3,48.8) 60.01,46.51 31.31,46.51 29.79,44.99 29.79,41.68 v2(28.65,40.54)
IN3: length 35.4
  TOP w0.203: U7.31 67.34,48.29 v2(67.99,48.95)
  TOP w0.508: U13.2 v2(39.06,40.54)
  IN2 w0.203: v2(67.99,48.95) 62.89,43.84 42.36,43.84 v2(39.06,40.54)
IN4: length 75.4
  TOP w0.203: v2(75.38,55.02) 72.73,55.02 71.93,54.22 U7.16
  TOP w0.508: U10.2 v1(135.33,41.3)
  IN2 w0.203: v2(75.38,55.02) 79.45,55.02 83.26,51.21 130.12,51.21 135.96,45.37 135.96,41.94 v1(135.33,41.3)
IN5: length 67.3
  TOP w0.203: U7.17 71.43,54.88 v2(72.33,55.78)
  TOP w0.508: U12.2 v2(124.53,41.18)
  IN2 w0.203: v2(72.33,55.78) 73.86,54.26 79.32,54.26 82.87,50.7 122.24,50.7 123.77,49.18 123.77,41.94 v2(124.53,41.18)
IN6: length 56.4
  TOP w0.203: U7.18 70.93,55.04 71.19,55.3 v2(71.19,55.91)
  TOP w0.508: U14.2 v1(113.48,41.3)
  IN2 w0.203: v2(71.19,55.91) 73.35,53.75 78.94,53.75 82.49,50.19 110.56,50.19 112.59,48.16 112.59,42.19 v1(113.48,41.3)
NRST: length 39.2
  TOP w0.203: R1.1 C15.2 78,40.99 78.06,40.92 TP8.1 v2(79.32,38.51) ; v2(72.65,48.48) 73.71,48.48 74.03,48.79 U7.7
  IN2 w0.203: v2(72.65,48.48) 68.59,48.48 66.11,46 66.11,43.84 65.09,42.83 65.09,38.8 65.89,38 74.75,38 76.14,39.4 78.43,39.4 v2(79.32,38.51)
OSC_IN: length 10.2
  TOP w0.203: C13.2 81.92,44.68 81.87,44.74 X1.1 81.87,46.83 80.91,47.79 U7.5
OSC_OUT: length 8.4
  TOP w0.203: C14.2 78.78,52.48 79.41,51.86 79.41,51.82 79.47,51.76 X1.3 79.47,49.34 78.42,48.29 U7.6
OUTUA: length 28.9
  TOP w0.508: v1(15.31,41.94) U9.6 12.52,41.94 12.14,41.56 C24.2
  IN2 w0.508: J4.1 12.26,28.72 12.26,34.32 15.31,37.37 v1(15.31,41.94)
  vias: v1(7.82,17.68) v1(7.82,16.54) v1(8.83,17.68) v1(8.83,16.54) v1(9.85,17.68) v1(9.85,16.54) v1(10.99,17.68) v1(10.99,16.54) v1(12.01,17.68) v1(12.01,16.54)
OUTUB: length 31.7
  TOP w0.508: v1(132.53,42.57) U10.6 130.44,42.57 C25.2
  IN2 w0.508: J5.3 137.36,29.1 137.36,35.08 136.21,36.22 133.17,36.22 132.53,36.86 v1(132.53,42.57)
  vias: v1(132.53,19.08) v1(137.1,19.08) v1(138.75,19.08) v1(140.15,19.08) v1(141.55,19.08) v1(141.68,20.47) v1(142.95,20.6) v1(143.07,19.08)
OUTVA: length 22.6
  TOP w0.508: v1(25.85,41.81) U11.6 23.76,41.81 C30.2
  IN2 w0.508: v1(22.68,24.16) 22.68,34.19 25.85,37.37 v1(25.85,41.81)
  vias: v1(21.53,24.16) v1(21.53,23.14) v1(21.53,22.13) v1(21.53,21.11) v1(21.53,20.09) v1(22.68,23.14) v1(22.68,22.13) v1(22.68,21.11) v1(22.68,20.09)
OUTVB: length 27.5
  TOP w0.508: C31.2 119.77,42.45 U12.6 v1(121.99,42.45)
  IN2 w0.508: v1(121.99,42.45) 121.99,37.11 122.88,36.22 127.58,36.22 128.98,34.83 128.98,26.39 127.96,25.38 v1(127.96,24.54)
  vias: v1(127.96,23.65) v1(127.96,22.76) v1(127.96,21.87) v1(127.96,20.86) v1(128.98,24.54) v1(128.98,23.65) v1(128.98,22.76) v1(128.98,21.87) v1(128.98,20.86)
OUTWA: length 22.6
  TOP w0.508: C39.2 34.3,41.81 U13.6 v1(36.39,41.81)
  IN2 w0.508: v1(36.39,41.81) 36.39,35.71 34.36,33.68 34.36,25.68 v1(32.96,24.28)
  vias: v1(31.95,24.28) v1(31.95,23.4) v1(31.95,22.38) v1(31.95,21.36) v1(31.95,20.35) v1(32.96,23.27) v1(32.96,22.25) v1(32.96,21.36) v1(32.96,20.35)
OUTWB: length 28.3
  TOP w0.508: C40.2 108.59,42.57 U14.6 v1(111.07,42.57)
  IN2 w0.508: v1(117.04,24.28) 117.04,25.12 117.55,25.63 117.55,35.46 117.04,35.97 111.7,35.97 111.07,36.6 v1(111.07,42.57)
  vias: v1(116.02,24.28) v1(116.02,23.27) v1(116.02,22.25) v1(116.02,21.36) v1(116.02,20.35) v1(117.04,23.27) v1(117.04,22.25) v1(117.04,21.36) v1(117.04,20.35)
PB9: length 30.5
  TOP w0.203: U8.3 v2(90.24,49.3) ; U8.3 R7.2 ; U8.3 U8.2 ; v2(86.56,44.48) 86.56,45.09 86.68,45.21 v2(86.68,49.05) ; v2(72.59,45.49) 72.43,45.34 U7.46
  IN2 w0.203: v2(90.24,49.3) 86.94,49.3 v2(86.68,49.05) ; v2(86.56,44.48) 85.29,43.21 74.87,43.21 v2(72.59,45.49)
PF6: length 2.7
  TOP w0.203: R55.1 64.18,47.27 65.16,46.29 U7.35
PF7: length 2.3
  TOP w0.203: R54.1 64.89,45.75 64.93,45.79 U7.36
SWCLK: length 59.1
  TOP w0.203: v2(100.11,43.88) D10.2 99.64,43.84 ; v2(65.98,41.05) 67.93,43 U7.37 ; 99.64,44.22 99.64,57.18 100.4,57.94 102.24,57.94 J6.5
  TOP w0.254: D10.2 99.64,44.22
  IN2 w0.203: v2(100.11,43.88) 98.42,42.19 92.15,42.19 89.99,40.03 76.4,40.03 76.14,40.29 66.75,40.29 v2(65.98,41.05)
SWDIO: length 63.4
  TOP w0.203: v2(99,43.88) D9.2 98.5,45.37 99,45.87 99,57.3 100.15,58.45 104.23,58.45 J6.4 ; U7.34 67.35,46.79 v2(67.63,46.51)
  IN2 w0.203: v2(99,43.88) 97.82,42.7 91.64,42.7 89.55,40.62 76.57,40.62 76.14,41.05 67.25,41.05 66.75,41.56 66.75,45.62 v2(67.63,46.51)
UART1_RX: length 73.8
  TOP w0.203: J6.2 108.21,59.46 99.38,59.46 97.99,58.07 97.99,46.89 96.08,44.99 D7.2 v2(96.55,43.88) ; R5.1 92.78,54.92 93.67,54.03 93.67,49.3 92.91,48.54 89.22,48.54 87.83,47.14 v2(87.83,44.73) ; v2(71.32,43.08) 70.93,43.47 U7.43
  IN2 w0.203: v2(71.32,43.08) 71.83,42.57 85.54,42.57 87.27,44.3 87.4,44.3 v2(87.83,44.73) 95.7,44.73 v2(96.55,43.88)
UART1_TX: length 65.3
  TOP w0.203: J6.3 106.22,58.96 99.77,58.96 98.5,57.69 98.5,46.38 97.35,45.24 D8.2 v2(97.82,43.88) ; v2(87.45,43.59) 87.19,43.84 87.19,47.27 88.97,49.05 U8.4 ; U7.42 70.43,43.39 v2(70.25,43.21)
  IN2 w0.203: v2(70.25,43.21) 71.4,42.06 85.92,42.06 v2(87.45,43.59) 88.34,42.7 90.11,42.7 90.62,43.21 97.15,43.21 v2(97.82,43.88)
VBLDC: length 12.5
  TOP w1.016: C43.1 v1(95.4,28.35)
  IN2 w1.016: v1(95.4,28.35) 95.4,25.29 C35.1
VECDA: length 4
  TOP w0.203: J1.1 8.01,37 8.16,36.86 TP12.1
  vias: v1(11.75,52.1) v1(12.64,52.1)
VECDB: length 4
  TOP w0.203: J3.5 141.96,37 141.84,37.11 TP13.1
N00514: length 7.2
  TOP w0.508: U9.7 15.18,40.67 15.56,40.29 15.56,38.38 14.8,37.62 D13.2 13.42,37.32 R10.1
N00518: length 10.8
  TOP w0.508: D15.2 17.23,37.32 R12.1 16.71,37.82 16.45,38.07 16.45,42.57 15.82,43.21 U9.5
N00591: length 11.7
  TOP w0.508: v2(12.14,38.38) C24.1 13.82,39.33 U9.8 ; v2(13.66,45.37) D12.2
  IN2 w0.508: v2(13.66,45.37) 12.14,43.84 v2(12.14,38.38)
N00647: length 23.4
  TOP w0.508: v2(17.09,15.65) 18.68,15.65 Q1.1 ; R10.2 14.28,34.89 D13.1 v2(14.8,33.17)
  IN2 w0.508: v2(14.8,33.17) 14.8,17.93 v2(17.09,15.65)
N00664: length 11.4
  TOP w0.508: R12.2 18.09,34.89 D15.1 v2(19.83,34.37) ; v2(20.14,28.98) 20.14,28.17 19.71,27.74 Q3.1
  IN2 w0.508: v2(19.83,34.37) 19.83,29.29 v2(20.14,28.98)
N00708: length 15.3
  TOP w0.203: R24.2 47.38,34.25 46.81,33.68 46.81,33.3 v2(47.06,33.05) ; 45.37,26.48 45.37,25.97 v2(45.41,25.94)
  IN2 w0.203: v2(45.41,25.94) 46.02,25.94 46.27,25.68 47.57,25.68 48.08,26.19 48.08,33.81 47.82,34.06 46.93,34.06 46.68,33.81 46.68,33.43 v2(47.06,33.05)
N02294: length 6.9
  TOP w0.508: R14.1 25.07,36.79 D19.2 25.6,37.87 26.11,38.38 26.11,40.03 25.85,40.29 25.83,40.29 25.58,40.54 U11.7
N02298: length 10.9
  TOP w0.508: U11.5 26.36,43.08 26.99,42.45 26.99,38.64 27.63,38 R16.1 29.26,36.79 D21.2
N02334: length 11.7
  TOP w0.508: v2(23.57,44.6) 24.33,45.37 D18.2 ; U11.8 22.74,39.27 C30.1 v2(22.68,38.38)
  IN2 w0.508: v2(23.57,44.6) 23.57,39.27 v2(22.68,38.38)
N02346: length 23.4
  TOP w0.508: R14.2 25.07,34.89 D19.1 v2(25.6,33.3) ; v2(27.38,15.78) 29.14,15.78 Q6.1
  IN2 w0.508: v2(25.6,33.3) 25.6,17.55 v2(27.38,15.78)
N02362: length 9.8
  TOP w0.508: R16.2 29.01,34.89 D21.1 v2(29.66,33.3) ; Q7.1 30.23,28.86 v2(30.55,28.86)
  IN2 w0.508: v2(30.55,28.86) 29.66,29.75 v2(29.66,33.3)
N02436: length 85.9
  TOP w0.203: U7.20 69.93,51.89 69.92,51.88 v2(69.92,51.21) ; v2(52.14,48.1) R39.1 51.25,48.06 50.4,47.21 49.27,47.21 48.76,47.72 U17.4 47.9,47.11 47.95,47.07 v2(47.95,45.75)
  TOP w0.508: U13.3 v2(39.06,41.81) ; U11.3 v2(28.65,41.81) ; U9.3 v2(18.1,41.94)
  IN2 w0.203: v2(40.58,45.49) 40.15,45.93 33.9,45.93 33.34,45.37 33.34,40.16 32.71,39.52 28.26,39.52 27.88,39.91 27.88,41.05 v2(28.65,41.81) 28.65,42.42 28.24,42.83 25.51,42.83 24.71,42.03 24.71,38.25 23.44,36.98 17.47,36.98 17.09,37.37 17.09,40.92 v2(18.1,41.94) ; v2(40.58,45.49) 39.06,43.97 v2(39.06,41.81) ; v2(40.58,45.49) 47.7,45.49 v2(47.95,45.75) ; v2(52.14,48.1) 59.7,48.1 62.3,50.7 69.41,50.7 v2(69.92,51.21)
N02448: length 124.3
  TOP w0.203: R40.1 114.05,50 114.74,49.32 114.74,47.78 114.8,47.72 U18.4 v2(115.59,46.81) ; U7.19 70.43,53.87 v2(69.92,54.38)
  TOP w0.508: U10.3 v1(135.2,42.57) ; U12.3 v1(124.53,42.45) ; U14.3 v1(113.48,42.57)
  IN2 w0.203: v2(69.92,54.38) 71.83,52.48 74.49,52.48 75.51,51.46 80.21,51.46 82.24,49.43 84.02,49.43 85.16,48.29 91.64,48.29 93.03,49.68 99.64,49.68 100.65,48.67 102.05,48.67 102.94,47.78 102.94,39.14 104.85,37.24 109.04,37.24 109.29,37.49 109.29,43.64 109.49,43.84 111.58,43.84 112.08,43.33 112.08,40.67 112.47,40.29 114.24,40.29 114.5,40.54 114.5,41.56 v1(113.48,42.57) 113.48,46 114.29,46.81 v2(115.59,46.81) 116.28,46.13 118.56,46.13 119.45,47.02 122.12,47.02 122.79,46.35 122.79,40.89 123.26,40.41 125.17,40.41 125.42,40.67 125.42,41.56 v1(124.53,42.45) 124.53,46.76 125.04,47.27 132.91,47.27 135.2,44.99 v1(135.2,42.57)
N03219: length 7.1
  TOP w0.508: R18.1 36.76,36.79 D27.2 37.15,38.26 36.52,38.89 36.52,39.91 35.88,40.54 U13.7
N03223: length 11.2
  TOP w0.508: U13.5 36.65,43.08 37.41,42.32 37.41,39.47 39.06,37.82 R20.1 40.57,36.79 D29.2
N03259: length 11.3
  TOP w0.508: v2(33.22,38.38) C39.1 33.28,39.27 U13.8 ; v2(34.87,44.73) 35.38,45.24 D25.2
  IN2 w0.508: v2(33.22,38.38) 34.87,40.03 v2(34.87,44.73)
N03271: length 22.8
  TOP w0.508: v2(37.66,15.78) 39.3,15.78 Q9.1 ; R18.2 36.5,34.89 D27.1 v2(37.15,33.3)
  IN2 w0.508: v2(37.15,33.3) 37.15,16.28 v2(37.66,15.78)
N03287: length 11
  TOP w0.508: v2(40.58,27.84) 39.43,27.84 Q11.1 ; v2(39.06,33.56) R20.2 40.31,34.89 D29.1
  IN2 w0.508: v2(40.58,27.84) 39.06,29.36 v2(39.06,33.56)
N08581: length 7.8
  TOP w0.508: D14.2 134.18,40.54 133.42,41.3 U10.7
  TOP w1.016: D14.2 133.53,37.68 R11.1
N08585: length 16
  TOP w0.508: v1(133.42,43.33) 132.91,43.84 U10.5
  TOP w1.016: v2(139.18,38.08) D16.2 136.36,38.08 R13.1
  IN2 w0.508: v2(139.18,38.08) 134.48,38.08 133.42,39.14 v1(133.42,43.33)
N08621: length 11.8
  TOP w0.508: 131.23,40.03 129.42,40.03 C25.1 v1(129.36,39.02) ; D11.2 v1(131.13,45.87)
  IN2 w0.508: v1(131.13,45.87) 129.36,44.1 v1(129.36,39.02)
N08633: length 24.6
  TOP w1.016: v1(136.09,15.39) 137.68,15.39 Q2.1 ; v1(134.18,34.19) D14.1 133.78,35.78 R11.2
  IN2 w1.016: v1(134.18,34.19) 134.18,17.3 v1(136.09,15.39)
N08649: length 9.5
  TOP w1.016: Q4.1 137.7,30.1 137.99,30.4 D16.1 137.21,35.91 R13.2
N08681: length 15.2
  TOP w0.203: 103.45,26.82 103.45,25.81 103.59,25.67 103.94,25.67 v2(104.08,25.81) ; R26.2 v2(104.34,35.97)
  IN2 w0.203: v2(104.34,35.97) 103.88,35.51 103.88,35 102.81,33.94 102.81,25.81 102.96,25.67 103.3,25.67 103.45,25.81 v2(104.08,25.81)
N08995: length 6.3
  TOP w0.508: R15.1 122.23,37.81 D20.2 122.5,39.94 121.26,41.18 U12.7
